# Altium PCB GatewayLoRa.PcbDoc
Units mil, origin at the board's own origin, x right, y up, seen from the top; angles counter-clockwise.
Board outline 3531.25 x 2281.25 mil, 2 copper layers (Top, Bottom); 77 components, 73 nets, 306 pads, 28 vias.
Unrouted connection lines stored in the file: 159.
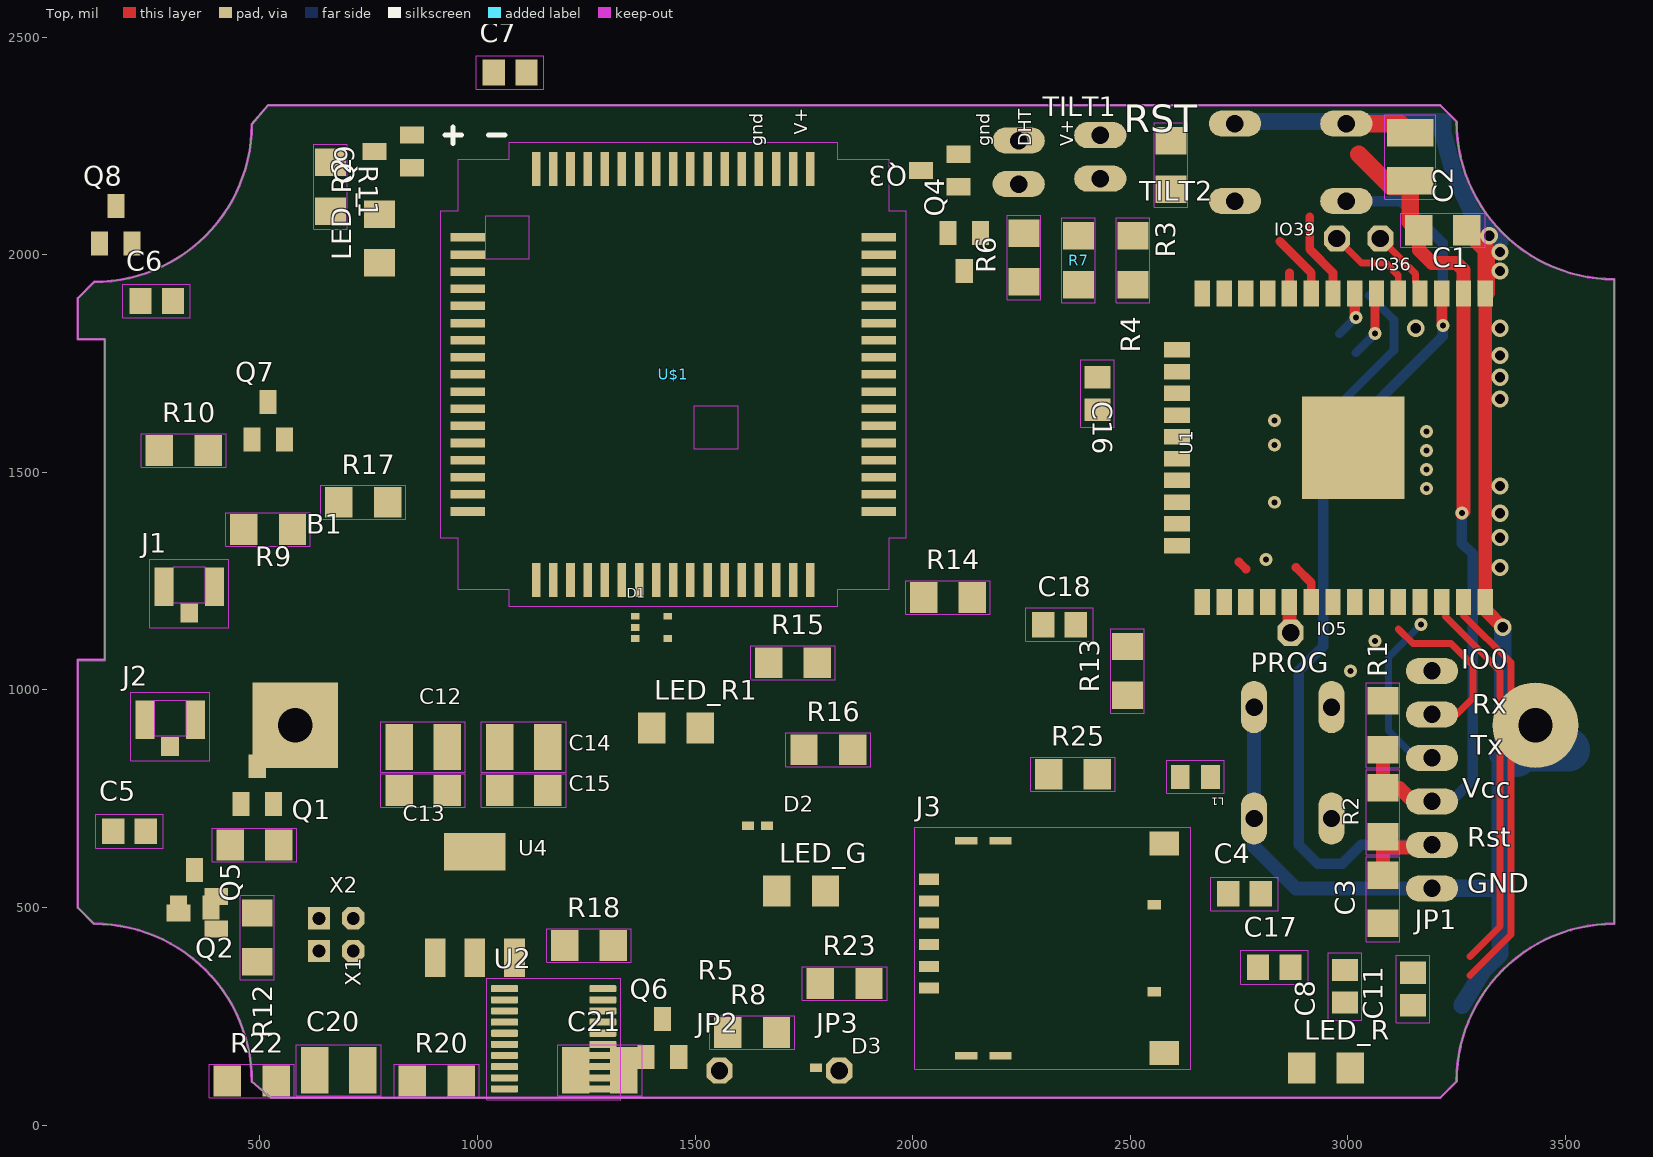
[diagram p0: Top view]
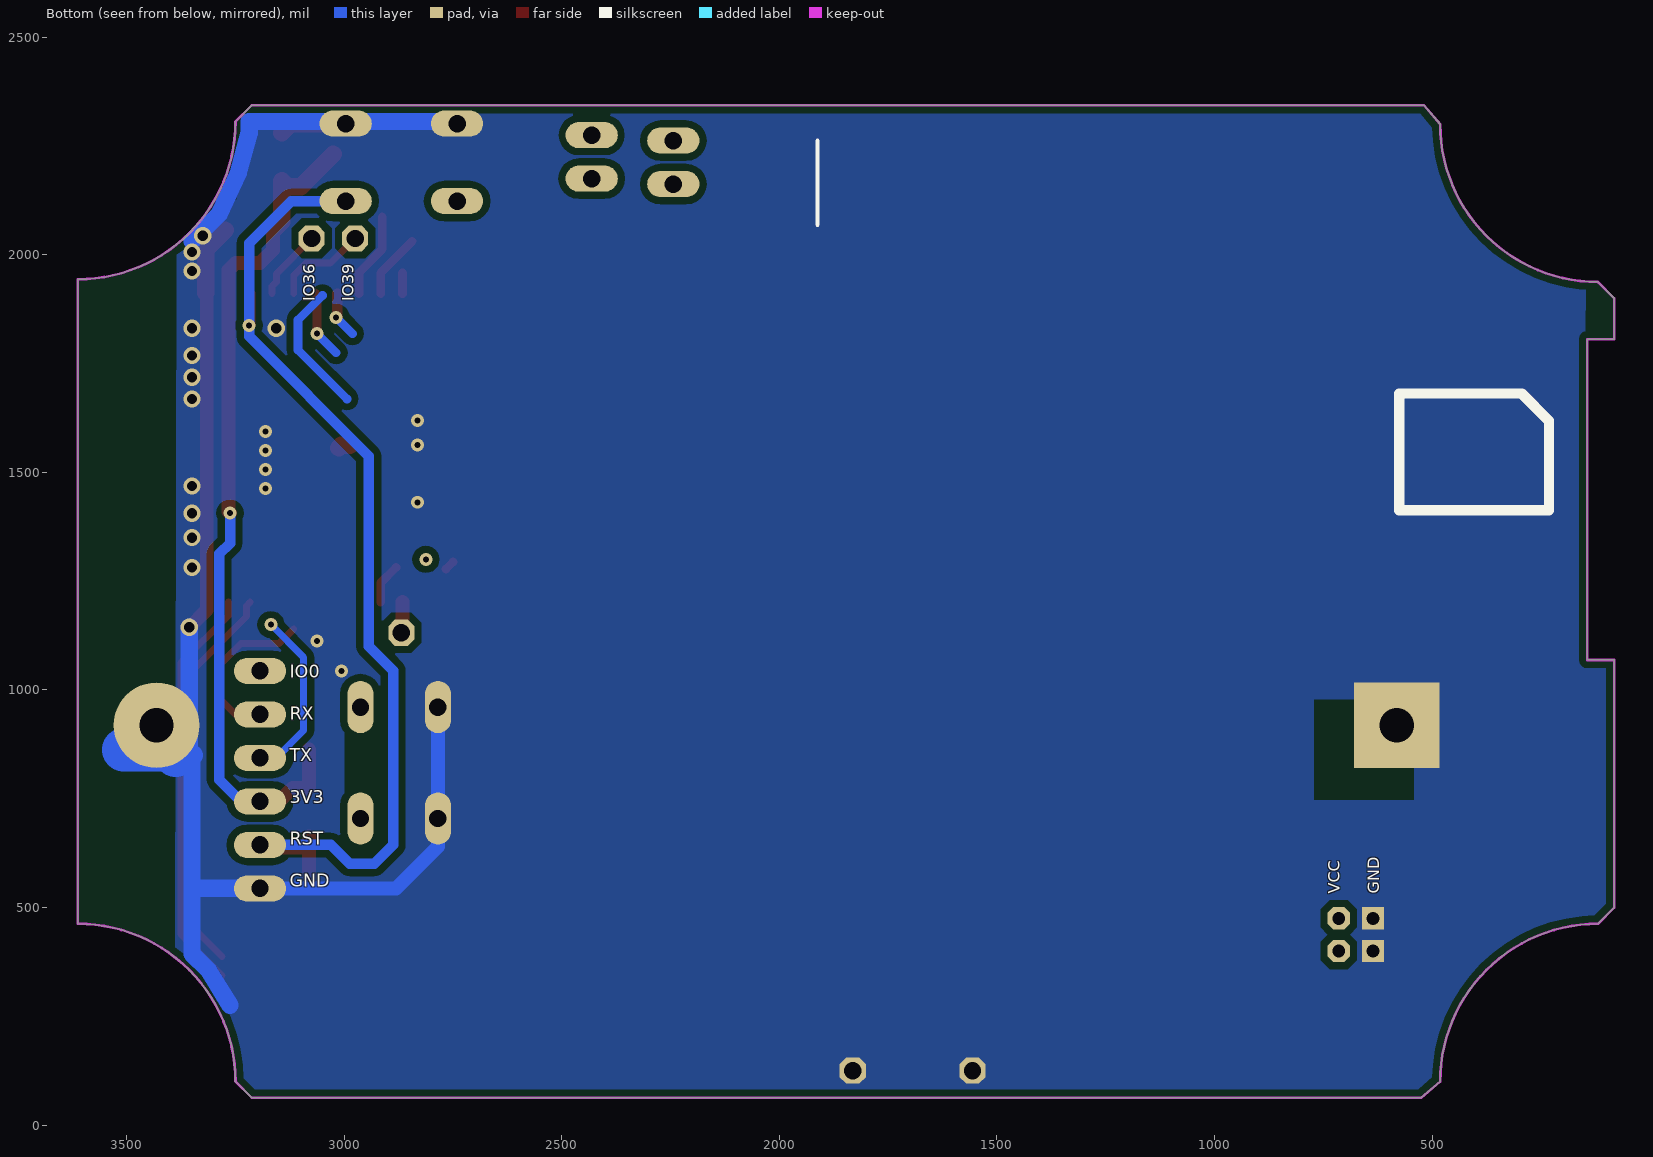
[diagram p1: Bottom view, seen from below]

## Layer stack, top to bottom
Top Solder: solder mask 0.4, Solder Resist, Dk 3.5
Top: signal copper 1.378
Dielectric 1: dielectric 12.6, FR-4, Dk 4.8
Bottom: signal copper 1.378
Bottom Solder: solder mask 0.4, Solder Resist, Dk 3.5

## Board outline
3250,2306.25 3212.5,2343.75 518.75,2343.75 481.25,2300 cw(c118.75,2300) 118.75,1937.5 81.25,1900 81.25,1806.25 143.75,1806.25 143.75,1068.75 81.25,1068.75 81.25,500 118.75,462.5 cw(c118.75,100) 481.25,100 525,62.5 3212.5,62.5 3250,100 cw(c3612.5,100) 3612.5,462.5 3612.5,1943.75 cw(c3612.5,2306.25)

## Design rules (kind name [scope] priority, off if disabled: settings)
Clearance Clearance_for_PolygonClass_Isolate_16 [InPolygonClass('Isolate_16') vs IsArc Or IsTrack Or IsPad Or IsVia Or IsFill Or IsRegion Or IsText] p1: gap=16 ignorepadtopadclearanceinfootprint=FALSE
Clearance "Clearance (Same Net)" [All] p2: gap=6 ignorepadtopadclearanceinfootprint=FALSE
Clearance [All] p3: gap=6 ignorepadtopadclearanceinfootprint=FALSE
HoleSize [All] p1: absolutevalues=TRUE maxlimit=100000 minlimit=13.78 maxpercent=80.000 minpercent=20.000
HoleToHoleClearance mdDrill [All] p1: gap=6 allowstackedmicrovias=TRUE
MinimumSolderMaskSliver [All] p1 off: minsoldermaskwidth=10
PasteMaskExpansion mlMinCreamFrame [All] p1: expansion=0
PolygonConnect PolygonConnect_For_PolygonThermal_ON_Width60000_Gap100000 [InPolygonClass('PolygonThermal_ON_Width60000_Gap100000') vs Not IsVia] p1: connectstyle=Relief reliefconductorwidth=6 reliefentries=4 polygonreliefangle="90 Angle" airgapwidth=10
PolygonConnect ThermalVias [IsVia] p2: connectstyle=Direct reliefconductorwidth=10 reliefentries=4 polygonreliefangle="90 Angle" airgapwidth=10
PolygonConnect [All] p3: connectstyle=Relief reliefconductorwidth=10 reliefentries=4 polygonreliefangle="90 Angle" airgapwidth=10
RoutingVias [All] p1: holewidth=13.78 width=29.78 viastyle="Through Hole" minholewidth=13.78 minwidth=29.78 maxholewidth=100 maxwidth=100
SolderMaskExpansion mlMinStopFrame [All] p1: expansion=4 istentingtop=FALSE
Width [All] p1: maxlimit=10 minlimit=6 preferedwidth=6
26 further rules are at their usual default settings.

## Classes and differential pairs
polygon class PolygonThermal_ON_Width60000_Gap100000: Polygon_2_Net_GND
polygon class Isolate_16: Polygon_2_Net_GND

## Components (designator, comment, footprint, x,y, rotation, side; value= is the part's Value field where it differs from the comment)
B1 "18650_HOLDER" 18650 2006.25,918.75 r0 top
C1 "100n" C1206 3218.75,2056.25 r0 top
C2 "10u" C1210 3143.75,2225 r90 top
C3 "100n" C1206 3081.25,518.75 r270 top
C4 "33pF" C0805 2762.5,531.25 r0 top
C5 "100uF" C0805 200.1,675 r0 top
C6 "100uF" C0805 262.6,1893.75 r0 top
C7 "0.22uF" C0805 1075,2418.75 r0 top
C8 "1uF" C0805 2993.75,318.75 r90 top
C11 "0.1uF" C0805 3150,312.5 r90 top
C12 "10u" C1210 875,868.75 r0 top
C13 "100n" C1206 875,768.75 r0 top
C14 "10u" C1210 1106.25,868.75 r180 top
C15 "100n" C1206 1106.25,768.75 r180 top
C16 "100uF" C0805 2425,1681.25 r270 top
C17 "100uF" C0805 2831.25,362.5 r0 top
C18 "100nF" C0805 2337.5,1150 r0 top
C20 "0.1uF" C1210 681.25,125.86 r0 top
C21 "0.1uF" C1210 1281.25,125.86 r0 top
D1 "" SC88A 1362.5,1143.75 r0 top
D2 "PESD5V0X1UB" SOD523 1643.75,687.5 r0 top
D3 "PESD5V0X1UB" SOD523 1800,131.25 r0 top
IO5 "TP" 1X01 2868.75,1131.25 r0 top
IO36 "" 1X01 3075,2037.5 r0 top
IO39 "" 1X01 2975,2037.5 r90 top
J1 "U.FL-R-SMT(01)" HRS_U.FL-R-SMT(01) 337.5,1237.5 r0 top
J2 "U.FL-R-SMT(01)" HRS_U.FL-R-SMT(01) 293.75,931.25 r0 top
J3 "78646-3001" MOLEX_78646-3001 2325,406.25 r0 top
JP1 "" 1X06 3193.75,793.75 r90 top
JP2 "" 1X01 1556.25,125 r0 top
JP3 "" 1X01 1831.25,125 r0 top
L1 "27nH" INDC2012X100N 2650,800 r180 top
LED_G "" 1206 1743.75,537.5 r0 top
LED_R "" 1206 2950,131.25 r0 top
LED_R1 "Bleue" 1206 1456.25,912.5 r0 top
LED_R2 "Bleue" 1206 775,2037.5 r90 top
PROG "" B3F-10XX 2873.75,832.5 r270 top
Q1 "SI2305CDS" SOT23 493.75,781.25 r0 top
Q2 "BSS138" SOT23 356.25,487.5 r90 top
Q3 "SI2305CDS" SOT23 2062.5,2193.75 r90 top
Q4 "BSS138" SOT23 2118.75,2006.25 r180 top
Q5 "SI2305CDS" SOT23 349.9,543.31 r0 top
Q6 "BSS138" SOT23 1425,200 r0 top
Q7 "BSS138" SOT23 518.75,1618.75 r0 top
Q8 "BSS138" SOT23 168.75,2068.75 r0 top
Q9 "BSS138" SOT23 806.25,2237.5 r90 top
R1 "100k" R1206 3081.25,918.75 r90 top
R2 "10k" R1206 3081.25,718.75 r90 top
R3 "1M" R1206 2593.75,2206.25 r90 top
R4 "1M" R1206 2506.25,1987.5 r90 top
R5 "33k" R1206 487.5,643.75 r0 top
R6 "33k" R1206 2256.25,1993.75 r270 top
R7 "" R1206 2381.25,1987.5 r270 top
R8 "470" R1206 1631.25,212.5 r0 top
R9 "33k" R1206 518.75,1368.75 r180 top
R10 "33k" R1206 325,1550 r0 top
R11 "470" R1206 662.5,2156.25 r270 top
R12 "100k" R1206 493.75,431.25 r90 top
R13 "10" R1206 2493.75,1043.75 r90 top
R14 "NC" R1206 2081.25,1212.5 r0 top
R15 "2.2k" R1206 1725,1062.5 r0 top
R16 "NC" R1206 1806.25,862.5 r0 top
R17 "2.2k" R1206 737.5,1431.25 r0 top
R18 "NC" R1206 1256.25,412.5 r0 top
R20 "NC" R1206 906.25,100.86 r0 top
R22 "10k" R1206 481.25,100.86 r0 top
R23 "150" R1206 1843.75,325 r0 top
R25 "100" R1206 2368.75,806.25 r0 top
RST "" B3F-10XX 2868.75,2212.5 r180 top
TILT1 "" 1X02 2243.75,2212.5 r90 top
TILT2 "" 1X02 2431.25,2225 r90 top
U1 "ESP-WROOM-03" ESP-WROOM-03 3012.89,1556.55 r0 top
U2 "TXB0108PWR" SOP65P640X120-20N 1175,198.12 r0 top
U4 "MIC5239S" SOT223 993.75,506.25 r0 top
U$1 "" SIM7000G 1450,1725 r0 top
X1 "S2B-PH-K-S" S2B-PH-K-S 675,400 r180 top
X2 "B2B-PH-K-S" B2B-PH-K-S 675,475 r180 top

## Footprints (in the part's own frame and the unit in brackets; to place one, negate y for a bottom-side part, rotate by r counter-clockwise, add the part's x,y. Pads: shape width x height; smd on the part's side, far side on the other; paste and mask are expansions set on the pad)
1X01 [mil] "1X01"
  oct 60x60 / inner round 55.43 / far side oct 60x60 hole 40: 1(0,0)
1X02 [mil] "1X02"
  oval 60x120 hole 40: 1(-50,0) 2(50,0)
1X06 [mil] "1X06"
  oval 60x120 hole 40: 1(-250,0) 2(-150,0) 3(-50,0) 4(50,0) 5(150,0) 6(250,0)
1206 [mil] "1206"
  rect 62.99x70.98 smd: A(-55.98,0) C(55.98,0)
18650 [mm] "18650"
  rect 5x5 / inner round 4.619 / far side rect 5x5 hole 2: +(-36.2,0)
  round 5 hole 2: -(36.2,0)
B2B-PH-K-S [mm] "B2B-PH-K-S"
  rect 1.3x1.3 / inner round 1.201 / far side rect 1.3x1.3 hole 0.75: 1(1,0)
  oct 1.3x1.3 / inner round 1.201 / far side oct 1.3x1.3 hole 0.75: 2(-1,0)
B3F-10XX [mil] "B3F-10XX"
  oval 120x60 hole 40: 1(-128,89) 2(128,89) 3(-128,-89) 4(128,-89)
C0805 [mil] "C0805"
  rect 51.18x59.06 smd: 1(-37.4,0) 2(37.4,0)
  Top keep-out lines w2: -77.68,-38.7 -77.68,38.7 77.68,38.7 77.68,-38.7 -77.68,-38.7
C1206 [mil] "C1206"
  rect 62.99x70.87 smd: 1(-55.12,0) 2(55.12,0)
  Top keep-out lines w2: -97.36,-38.7 -97.36,38.7 97.36,38.7 97.36,-38.7 -97.36,-38.7
C1210 [mil] "C1210"
  rect 62.99x106.3 smd: 1(-55.12,0) 2(55.12,0)
  Top keep-out lines w2: -97.36,58.39 -97.36,-58.39 97.36,-58.39 97.36,58.39 -97.36,58.39
ESP-WROOM-03 [mm] "ESP-WROOM-03"
  rect 0.9x1.5 smd: 1(7.7,9) 2(6.43,9) 3(5.16,9) 4(3.89,9) 5(2.62,9) 6(1.35,9) 7(0.08,9) 8(-1.19,9) 9(-2.46,9) 10(-3.73,9) 11(-5,9) 12(-6.27,9) 13(-7.54,9) 14(-8.81,9) 25(-8.81,-9) 26(-7.54,-9) 27(-6.27,-9) 28(-5,-9) 29(-3.73,-9) 30(-2.46,-9) 31(-1.19,-9) 32(0.08,-9) 33(1.35,-9) 34(2.62,-9) 35(3.89,-9) 36(5.16,-9) 37(6.43,-9) 38(7.7,-9)
  rect 1.5x0.9 smd: 15(-10.3,5.715) 16(-10.3,4.445) 17(-10.3,3.175) 18(-10.3,1.905) 19(-10.3,0.635) 20(-10.3,-0.635) 21(-10.3,-1.905) 22(-10.3,-3.175) 23(-10.3,-4.445) 24(-10.3,-5.715)
  rect 6x6 smd: GND(0,0)
HRS_U.FL-R-SMT(01) [mil] "HRS_U.FL-R-SMT(01)"
  rect 43.31x88.58 smd: 1(-58.07,0) 2(58.07,0)
  rect 41.34x43.31 smd: 3(0,-61.02)
  Top keep-out region: -35.55,-37.92 -35.55,45.28 35.43,45.28 35.43,-37.92
  Top keep-out lines w1.97: -90.55,-94.49 90.55,-94.49 90.55,62.99 -90.55,62.99 -90.55,-94.49
INDC2012X100N [mil] "INDC2012X100N"
  rect 43.31x55.91 smd: 1(-34.84,0) 2(34.84,0)
  Top keep-out lines w1.97: 66.34,37.8 66.34,-37.8 -66.34,-37.8 -66.34,37.8 66.34,37.8
MOLEX_78646-3001 [mm] "MOLEX_78646-3001"
  rect 1.15x0.65 smd: C1(-7.295,2.755) C2(-7.295,0.215) C3(-7.295,-2.325) C5(-7.295,4.025) C6(-7.295,1.485) C7(-7.295,-1.055)
  rect 1.3x0.45 smd: G1(-5.125,6.27) G2(-3.125,6.27) G3(-5.125,-6.27) G4(-3.125,-6.27)
  rect 1.7x1.4 smd: G5(6.435,-6.105) G6(6.435,6.105)
  rect 0.8x0.54 smd: X1(5.855,2.54) X2(5.855,-2.54)
  Top keep-out lines w0.05: -8.12,-7.06 -8.12,7.05 7.975,7.05 7.975,-7.06 -8.12,-7.06
R1206 [mil] "R1206"
  rect 62.99x70.98 smd: 1(-55.98,0) 2(55.98,0)
  Top keep-out lines w2: -97.36,38.7 -97.36,-38.7 97.36,-38.7 97.36,38.7 -97.36,38.7
S2B-PH-K-S [mm] "S2B-PH-K-S"
  rect 1.3x1.3 / inner round 1.201 / far side rect 1.3x1.3 hole 0.75: 1(1,0)
  oct 1.3x1.3 / inner round 1.201 / far side oct 1.3x1.3 hole 0.75: 2(-1,0)
SC88A [mm] "SC88A"
  rect 0.5x0.4 smd: 1(0,0.65) 2(0,0) 3(0,-0.65) 4(1.9,-0.65) 5(1.9,0.65)
SIM7000G [mm] "SIM7000G"
  rect 2x0.5 smd: P$1(-12,8) P$2(-12,7) P$3(-12,6) P$4(-12,5) P$5(-12,4) P$6(-12,3) P$7(-12,2) P$8(-12,1) P$9(-12,0) P$10(-12,-1) P$11(-12,-2) P$12(-12,-3) P$13(-12,-4) P$14(-12,-5) P$15(-12,-6) P$16(-12,-7) P$17(-12,-8) P$35(12,-8) P$36(12,-7) P$37(12,-6) P$38(12,-5) P$39(12,-4) P$40(12,-3) P$41(12,-2) P$42(12,-1) P$43(12,0) P$44(12,1) P$45(12,2) P$46(12,3) P$47(12,4) P$48(12,5) P$49(12,6) P$50(12,7) P$51(12,8)
  rect 0.5x2 smd: P$18(-8,-12) P$19(-7,-12) P$20(-6,-12) P$21(-5,-12) P$22(-4,-12) P$23(-3,-12) P$24(-2,-12) P$25(-1,-12) P$26(0,-12) P$27(1,-12) P$28(2,-12) P$29(3,-12) P$30(4,-12) P$31(5,-12) P$32(6,-12) P$33(7,-12) P$34(8,-12) P$52(8,12) P$53(7,12) P$54(6,12) P$55(5,12) P$56(4,12) P$57(3,12) P$58(2,12) P$59(1,12) P$60(0,12) P$61(-1,12) P$62(-2,12) P$63(-3,12) P$64(-4,12) P$65(-5,12) P$66(-6,12) P$67(-7,12) P$68(-8,12)
  Top keep-out region: 9.564,-13.564 -9.564,-13.564 -9.564,-12.564 -12.564,-12.564 -12.564,-9.564 -13.564,-9.564 -13.564,9.564 -12.564,9.564 -12.564,12.564 -9.564,12.564 -9.564,13.564 9.564,13.564 9.564,12.564 12.564,12.564 12.564,9.564 13.564,9.564 13.564,-9.564 12.564,-9.564 12.564,-12.564 9.564,-12.564
  Top keep-out region: 1.236,-4.363 1.236,-1.836 3.764,-1.836 3.764,-4.363
  Top keep-out region: -10.963,6.737 -10.963,9.263 -8.437,9.263 -8.437,6.737
SOD523 [mil] "SOD523"
  rect 27.56x19.69 smd: 1(21.65,0) 2(-21.65,0)
SOP65P640X120-20N [mil] "SOP65P640X120-20N"
  rrect25% 61.81x16.14 smd: 1(-112.99,115.16) 2(-112.99,89.57) 3(-112.99,63.98) 4(-112.99,38.39) 5(-112.99,12.8) 6(-112.99,-12.8) 7(-112.99,-38.39) 8(-112.99,-63.98) 9(-112.99,-89.57) 10(-112.99,-115.16) 11(112.99,-115.16) 12(112.99,-89.57) 13(112.99,-63.98) 14(112.99,-38.39) 15(112.99,-12.8) 16(112.99,12.8) 17(112.99,38.39) 18(112.99,63.98) 19(112.99,89.57) 20(112.99,115.16)
  Top keep-out lines w1.97: -153.94,-139.76 -153.94,139.76 153.94,139.76 153.94,-139.76 -153.94,-139.76
SOT23 [mm] "SOT23"
  rect 1x1.4 smd: 1(-0.95,-1.1) 2(0.95,-1.1) 3(0,1.1)
SOT223 [mil] "SOT223"
  rect 48x88 smd: 1(-91,-122) 2(0,-122) 3(91,-122)
  rect 141.73x86.61 smd: 4(0,122.01)

## Part data
B1: library part 18650, PackageName=18650
C1 C3 C13 C15: library part C1206, PackageName=C1206
C2 C12 C14 C20 C21: library part C1210, PackageName=C1210
C4 C5 C6 C7 C8 C11 C16 C17 C18: library part C0805, PackageName=C0805
D1: library part SC88A, PackageName=SC88A
D2 D3: library part SOD523, PackageName=SOD523
IO5 IO36 IO39 JP2 JP3: library part 1X01, PackageName=1X01
J1 J2: library part HRS_U.FL-R-SMT(01), PackageName=HRS_U.FL-R-SMT(01)
J3: library part MOLEX_78646-3001, PackageName=MOLEX_78646-3001
JP1: library part 1X06, PackageName=1X06
L1: library part INDC2012X100N, PackageName=INDC2012X100N
LED_G LED_R LED_R1 LED_R2: library part 1206, PackageName=1206
PROG RST: library part B3F-10XX, PackageName=B3F-10XX
Q1 Q2 Q3 Q4 Q5 Q6 Q7 Q8 Q9: library part SOT23, PackageName=SOT23
R1 R2 R3 R4 R5 R6 R7 R8 R9 R10 R11 R12 R13 R14 R15 R16 R17 R18 R20 R22 R23 R25: library part R1206, PackageName=R1206
TILT1 TILT2: library part 1X02, PackageName=1X02
U2: library part SOP65P640X120-20N, PackageName=SOP65P640X120-20N
U4: library part SOT223, PackageName=SOT223
U$1: library part SIM7000G, PackageName=SIM7000G
U1: PackageName=ESP-WROOM-03
X1: PackageName=S2B-PH-K-S
X2: PackageName=B2B-PH-K-S

## Via types
v1: diameter 29.78/29.78 (per signal layer), hole 13.78, Top to Bottom, 15 vias
v2: diameter 39.62/39.62 (per signal layer), hole 23.62, Top to Bottom, 13 vias

## Nets (pads, with @x,y where several pads share a name; then routed paths per layer and width w, separated by ;. In a path a pad name is that pad's centre, name@x,y a point inside that pad or via, vN(x,y) a via of type N, cw(c..) or ccw(c..) an arc to the next point about the centre after c; other vN are vias at no path point)
+1V8: C21.2 R15.1 R17.1 U2.2 U2.10 U$1.P$6 U$1.P$15
+3V3: C1.1 C2.1 C14.1 C15.1 JP1.3 Q3.2 R1.1 R2.2 R6.2 TILT1.2 TILT2.2 U1.2 U4.3 | length 1954.9
  Top w32: R1.1 R2.2 3119.02,774.73 3150,743.75 JP1.3 ; C1.1 3163.63,2011.37 3193.75,1981.25 3250,1981.25 3266.04,1965.21 U1.2 3266.04,1409.79 v1(3262.5,1406.25)
  Top w40: 3025,2231.25 3100,2156.25 3130.12,2156.25 C2.1 3143.75,2076.13 C1.1
  Bottom w24: JP1.3 3237.5,743.75 3287.5,793.75 3287.5,1312.5 3262.5,1337.5 v1(3262.5,1406.25)
+5V: C20.2 U2.19
DHT: U1.8 | length 198.8
  Top w20: 2912.5,2087.5 2912.5,2012.5 2966.04,1958.96 U1.8
GND: B1.- C1.2 C2.2 C3.2 C7.1 C8.1 C11.1 C12.2 C13.2 C14.2 C15.2 C16.1 C17.1 C18.1 C20.1 C21.1 D1.2 J1.3 J2.3 J3.C5 J3.G1 J3.G2 J3.G3 J3.G4 J3.G5 J3.G6 JP1.1 LED_G.C LED_R2.A LED_R.C PROG.3 PROG.4 Q2.2 Q4.2 Q6.2 Q9.2 R3.2 R4.2 R7.2 R12.2 R18.1 R22.1 RST.3 RST.4 U1.1 U1.15 U1.38 U1.GND U2.11 U4.2 U4.4 U$1.P$2 U$1.P$17 U$1.P$18 U$1.P$29 U$1.P$39 U$1.P$45 U$1.P$46 U$1.P$54 U$1.P$55 U$1.P$56 U$1.P$57 U$1.P$58 U$1.P$59 U$1.P$61 U$1.P$62 U$1.P$63 U$1.P$64 U$1.P$65 X1.1 X2.1 | length 3934.5
  Top w24: U1.GND U1.GND@3018.85,1562.5
  Top w32: U1.1@3318.75,1912.5 3317.67,1912.5 U1.1 U1.38 3316.04,1183.96 v2(3356.25,1143.75)
  Top w40: U1.GND@2987.5,1562.5 3006.94,1562.5 U1.GND ; RST.3 3122.37,2301.5 C2.2 ; C1.2 3318.75,2011.37 U1.1@3318.75,1912.5
  Bottom w32: PROG.3 PROG.4 2784.75,640.25 2881.25,543.75 JP1.1 ; RST.3 RST.3@3001.5,2306.25
  Bottom w40: RST.4@2736,2306.25 RST.4 2745.5,2306.25 3218.75,2306.25 3218.75,2279.17 3243.75,2187.5 3287.5,2093.75 3350,2031.25 ; JP1.1 3350,543.75 ; 3262.5,275 3312.5,356.25 3350,393.75 3350,543.75 ; 3350,850 3350,543.75 ; 3356.25,850 v2(3356.25,1143.75)
  Bottom w50: 3350,850 3356.25,850 B1.-@3387.5,850
  Bottom w100: B1.-@3387.5,850 3400,862.5 B1.-@3506.45,862.5
  other v1: 3006.25,1043.75 3062.5,1112.5 2831.25,1431.25 3181.25,1462.5 3181.25,1506.25 3181.25,1550 2831.25,1562.5 3181.25,1593.75 2831.25,1618.75
  other v2: 3350,1281.25 3350,1350 3350,1406.25 3350,1468.75 3350,1668.75 3350,1718.75 3350,1768.75 3156.25,1831.25 3350,1831.25 3350,1962.5 3350,2006.25 3325,2043.75
IO0: JP1.6 PROG.1 PROG.2 R1.2 U1.25
IO36: IO36.1 U1.4 | length 164.3
  Top w16: IO36.1 3156.25,1956.25 3156.25,1937.5 3166.04,1927.71 U1.4
IO39: IO39.1 U1.5 | length 218
  Top w16: IO39.1 3031.25,1981.25 3087.5,1981.25 3116.04,1952.71 U1.5
LED_G: R25.1 U1.10 | length 48.1
  Top w20: U1.10 2866.04,1958.96
LED_R: Q6.3 Q9.3 R8.1 R11.1 R23.1 U1.9 | length 150.3
  Top w20: 2843.75,2031.25 2916.04,1958.96 U1.9
LTE_DTR: U$1.P$3
LTE_RI: U$1.P$4
LTE_RXD: U$1.P$10
LTE_SCL: R16.1 R17.2 U2.7
LTE_SDA: R14.1 R15.2 U2.6
LTE_TXD: U$1.P$9
MEASURE: Q4.1 R7.1 U1.27 | length 330.1
  Top w20: 2750,1293.75 2766.04,1277.71
  Bottom w20: 2993.75,1668.75 3106.25,1781.25 3106.25,1850 3050,1906.25
N$1: Q1.1 Q2.3 Q5.1 R5.1
N$2: Q3.1 Q4.3 R6.1
N$3: J2.1 J2.2 U$1.P$60
N$4: C4.2 J1.1 J1.2 L1.1
N$5: C4.1 U$1.P$53
N$6: C5.2 D3.1 Q7.3 U$1.P$16
N$7: LED_R.A R23.2
N$8: LED_G.A R25.2
N$10: LED_R1.C R8.2
N$11: J3.C1
N$13: D1.5 J3.C7 U$1.P$31
N$14: D1.4 J3.C2 U$1.P$33
N$15: LED_R1.A
N$17: IO5.1 U1.29 | length 72.1
  Top w32: U1.29 2866.04,1133.96 IO5.1
N$18: R10.2
N$19: C8.2 C11.2 C16.2 C17.2
N$22: C5.1 D3.2 Q7.2 R9.1
N$25: C6.1 D2.2 Q8.2 R10.1
N$31: D2.1
N$32: 
N$33: LED_R2.C R11.2
N$34: R20.1
N$35: C18.2 R13.1
N$36: L1.2 R13.2
N$37: D1.3 U$1.P$32
N$38: R14.2 U$1.P$38
N$39: R16.2 U$1.P$37
N$40: C7.2 D1.1 U$1.P$30
N$41: J3.C3
N$42: R18.2 U$1.P$25
N$43: R22.2
N$44: U$1.P$34
N$45: JP3.1 U$1.P$23
NETLIGHT: Q6.1 U$1.P$52
NEXT: U1.26
NRESET_OUT: Q7.1 R9.2
POWER: Q2.1 R12.1 U1.37 | length 942.4
  Top w16: U1.37 3266.04,1171.46 3375,1062.5 3375,437.5 3281.25,343.75
PWR_STAT: Q9.1 U$1.P$66
PWRKEY_IN: C6.2 Q8.3 U$1.P$1
PWRKEY_OUT: Q8.1
RST: C3.1 JP1.2 R2.1 RST.1 RST.2 U1.3 | length 2403.1
  Top w24: U1.3 3216.04,1840.21 v1(3218.75,1837.5)
  Top w32: C3.1 R2.1@3081.25,637.5 ; R2.1 R2.1@3081.25,637.5 ; JP1.2 3187.5,637.5 R2.1@3081.25,637.5
  Bottom w24: RST.1 3121.75,2123.5 3218.75,2026.5 v1(3218.75,1837.5) 3218.75,1812.5 2943.75,1537.5 2943.75,1100 2887.5,1043.75 2887.5,643.75 2931.25,600 2987.5,600 3031.25,643.75 JP1.2
RX: JP1.5 U1.35 | length 390.5
  Top w16: 3116.04,1140.21 3150,1106.25 3237.5,1106.25 3287.5,1056.25 3287.5,981.25 3250,943.75 JP1.5
TILT1: R3.1 TILT1.1 U1.6 | length 155.5
  Top w20: v1(3062.5,1818.75) 3062.5,1907.33 U1.6
  Bottom w20: 3018.75,1775 v1(3062.5,1818.75)
TILT2: R4.1 TILT2.1 U1.7 | length 108.8
  Top w24: U1.7 3016.04,1858.96 v1(3018.75,1856.25)
  Bottom w20: 2981.25,1818.75 v1(3018.75,1856.25)
TX: JP1.4 U1.34 | length 404.5
  Top w24: v1@3166.04,1152.71 v1(3168.75,1150)
  Bottom w16: v1(3168.75,1150) 3093.75,1075 3093.75,906.25 3156.25,843.75 JP1.4
UC_DRT: U1.13 U2.16
UC_RI: U1.16 U2.17
UC_RX: U1.28 U2.20 | length 3.5
  Top w20: v1(2812.5,1300) v1@2816.04,1300
UC_SCL: U1.36 U2.14 | length 898.7
  Top w16: U1.36 3225,1193.26 3225,1168.75 3350,1043.75 3350,456.25 3281.25,387.5
UC_SDA: U1.33 U2.15
UC_TX: U1.30 U2.18 | length 93.5
  Top w20: 2881.25,1281.25 2916.04,1246.46 U1.30
V+: Q1.3 Q5.3
VALID: U1.24
VCC: B1.+ C12.1 C13.1 Q1.2 Q5.2 R5.2 U4.1 X1.2 X2.2
VDD: Q3.3
VPP: J3.C6
pads on no net: J3.X1 J3.X2 JP2.1 R20.2 U1.11 U1.12 U1.14 U1.17 U1.18 U1.19 U1.20 U1.21 U1.22 U1.23 U1.31 U1.32 U2.1 U2.3 U2.4 U2.5 U2.8 U2.9 U2.12 U2.13 U$1.P$5 U$1.P$7 U$1.P$8 U$1.P$11 U$1.P$12 U$1.P$13 U$1.P$14 U$1.P$19 U$1.P$20 U$1.P$21 U$1.P$22 U$1.P$24 U$1.P$26 U$1.P$27 U$1.P$28 U$1.P$35 U$1.P$36 U$1.P$40 U$1.P$41 U$1.P$42 U$1.P$43 U$1.P$44 U$1.P$47 U$1.P$48 U$1.P$49 U$1.P$50 U$1.P$51 U$1.P$67 U$1.P$68

## Polygon pours and split planes (outlines as drawn)
GND on Bottom "Polygon_2_Net_GND" (solid, remove dead copper, pour order 0): 523.76,59.5 484.5,98.76 484.5,143.41 465.89,224.03 434.92,292.17 385.32,354.18 329.52,403.77 236.55,453.35 149.79,465.75 117.51,465.75 84.51,498.74 78.22,1065.5 153.19,1065.5 146.92,1935.06 224.15,1952.88 292.39,1977.7 348.17,2014.89 397.76,2058.28 428.65,2101.52 472.08,2194.58 484.64,2301.38 523.76,2340.5 3213.74,2340.5 3246.75,2307.49 3246.75,2127.27 3384.39,2024.97 3388.66,393.84 3281.35,293.21 3281.35,270.86 3264.8,254.3 3233.04,85.04 3207.49,59.5

## Keep-outs
Keep-Out Layer:
  the board outline again, w6

## Silkscreen, mask and mechanical layers (free items; w line width, h text height)
Top Overlay:
  lines w12: 925,2275 962.5,2275 ; 943.75,2256.25 943.75,2293.75 ; 1025,2275 1062.5,2275
  text "V+" at 1768.72,2276.25 h49.6 r90
  text "gnd" at 1666.29,2249.59 h49.6 r90
  text "gnd" at 2187.5,2250 h49.6 r90
  text "DHT" at 2283.5,2250 h49.6 r90
  text "V+" at 2379.5,2250 h49.6 r90
  text "IO0" at 3261.06,1033.2 h77.5
  text "Rx" at 3286.71,929.75 h77.5
  text "Tx" at 3282.4,836 h77.5
  text "Vcc" at 3263.52,737.07 h77.5
  text "Rst" at 3275,625 h77.5
  text "GND" at 3275,518.75 h77.5
Bottom Overlay:
  lines w10: 1912.5,2068.75 1912.5,2262.5
  lines w24: 231.25,1412.5 575,1412.5 575,1681.25 293.75,1681.25 231.25,1618.75 231.25,1412.5
  text "IO39" at 2968.75,1893.75 h46.5 r270
  text "IO36" at 3058.75,1893.75 h46.5 r270
  text "IO0" at 3125,1017.5 h49.6
  text "RX" at 3125,921.5 h49.6
  text "TX" at 3125,825.5 h49.6
  text "3V3" at 3125,729.5 h49.6
  text "RST" at 3125,633.5 h49.6
  text "GND" at 3125,537.5 h49.6
  text "GND" at 612.5,531.25 h46.5 r270
  text "VCC" at 702.5,531.25 h46.5 r270
Dimension:
  lines w5: 3212.5,62.5 3250,100 ; 3212.5,2343.75 3250,2306.25
  lines w5.91: 81.25,1806.25 81.25,1900
  lines w6: 81.25,1806.25 143.75,1806.25 143.75,1068.75 81.25,1068.75 81.25,500 118.75,462.5 ; 81.25,1900 118.75,1937.5 ccw(c118.75,2300) 481.25,2300 518.75,2343.75 3212.5,2343.75 ; 3212.5,62.5 525,62.5 481.25,100 ; 3250,100 cw(c3612.5,100) 3612.5,462.5 3612.5,1943.75 cw(c3612.5,2306.25) 3250,2306.25 ; 118.75,462.5 cw(c118.75,100) 481.25,100 ; 118.75,462.5 cw(c118.75,100) 481.25,100
Unrouted:
  lines w0: 980.81,2175.1 1213.78,2197.44 ; 2740.75,2123.5 2996.75,2123.5 ; 2766.04,1202.21 2766.04,1277.71 ; 3018.85,1562.5 3181.25,1550 ; 3116.04,1140.21 3166.04,1202.21 ; 3116.04,1202.21 3166.04,1152.71 ; 3156.25,1831.25 3316.04,1910.88 3350,1831.25 3350,1768.75 3350,1718.75 3350,1668.75 ; 3181.25,1593.75 3181.25,1550 ; 3273.87,2056.25 3325,2043.75 3350,2031.25 3350,2006.25 3350,1962.5 ; 3316.04,1202.21 3350,1281.25 3350,1350 3350,1406.25 3350,1468.75 3181.25,1462.5 3181.25,1506.25 3181.25,1550
wert:
  lines w5: 3212.5,62.5 3243.75,100
  lines w6: 3243.75,100 cw(c3590.62,109.38) 3581.25,456.25 3618.75,493.75 3618.75,1331.25 ; 3618.75,1325 3618.75,1762.5

## Text inside footprints (layer, text, board x,y; h text height)
B1: tPlace "holder_18650" at 1376.25,953.75 h77.5; tPlace "1,2V" at 1756.25,768.75 h77.5
PROG: tDocu "4" at 2763.75,692.5 h77.5 r270; tDocu "3" at 2763.75,1012.5 h77.5 r270; tDocu "2" at 2933.75,692.5 h77.5 r270; tDocu "1" at 2938.75,1002.5 h77.5 r270
RST: tDocu "4" at 2728.75,2322.5 h77.5 r180; tDocu "3" at 3048.75,2322.5 h77.5 r180; tDocu "2" at 2728.75,2152.5 h77.5 r180; tDocu "1" at 3038.75,2147.5 h77.5 r180
U1: tDocu "Keepout Zone" at 3493.21,1556.55 h77.5 r270
U$1: tPlace "1" at 847.64,2012.4 h77.5